# Altium PCB usb_ttl.pcbdoc
Units mil, origin at the board's own origin, x right, y up, seen from the top; angles counter-clockwise.
Board outline 850 x 580 mil, 2 copper layers (Top Layer, Bottom Layer), stack 65.792 mil thick; 10 components, 10 nets, 59 pads, 2 vias.
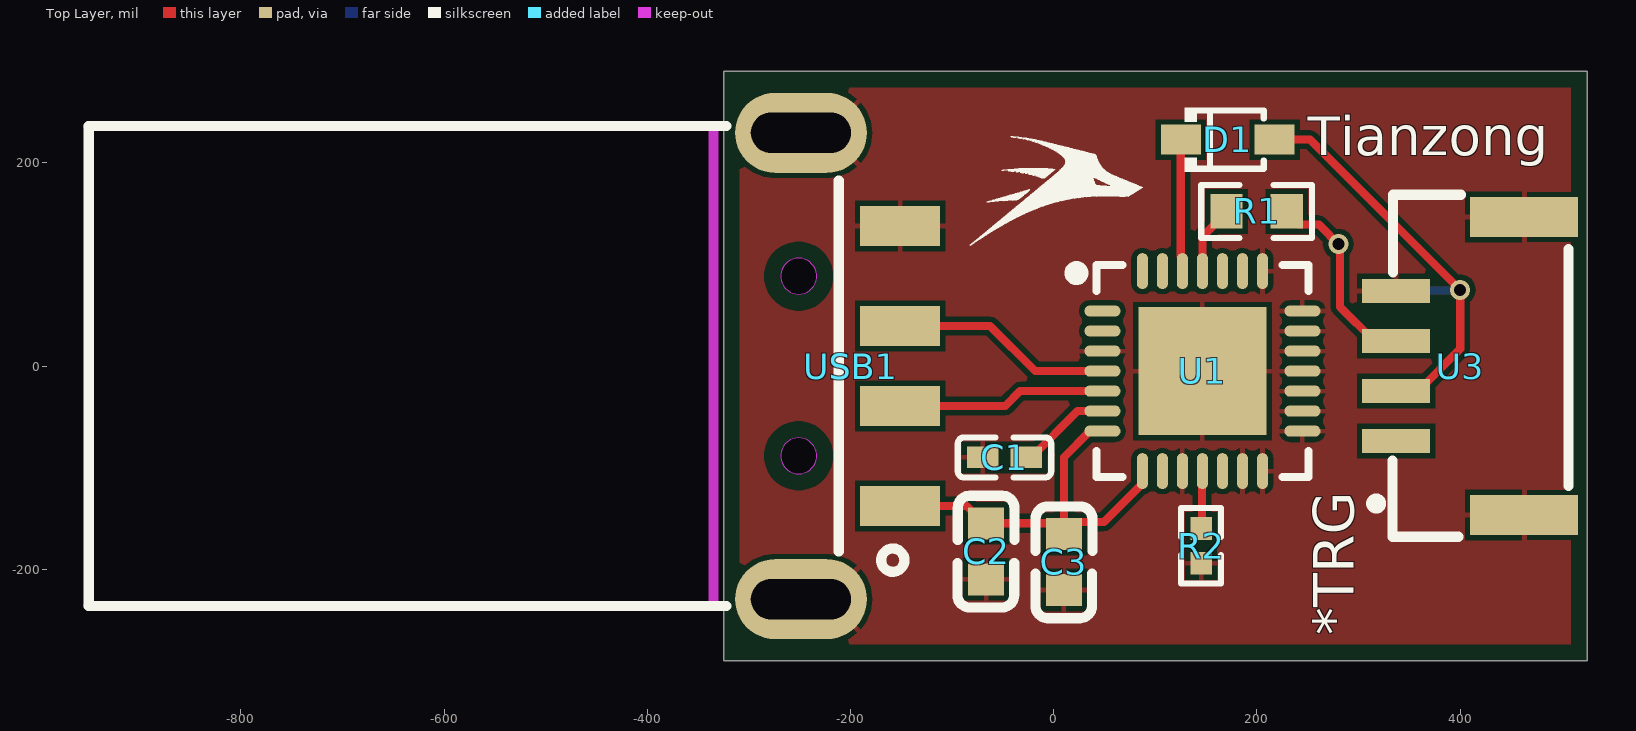
[diagram p0: Top Layer view]
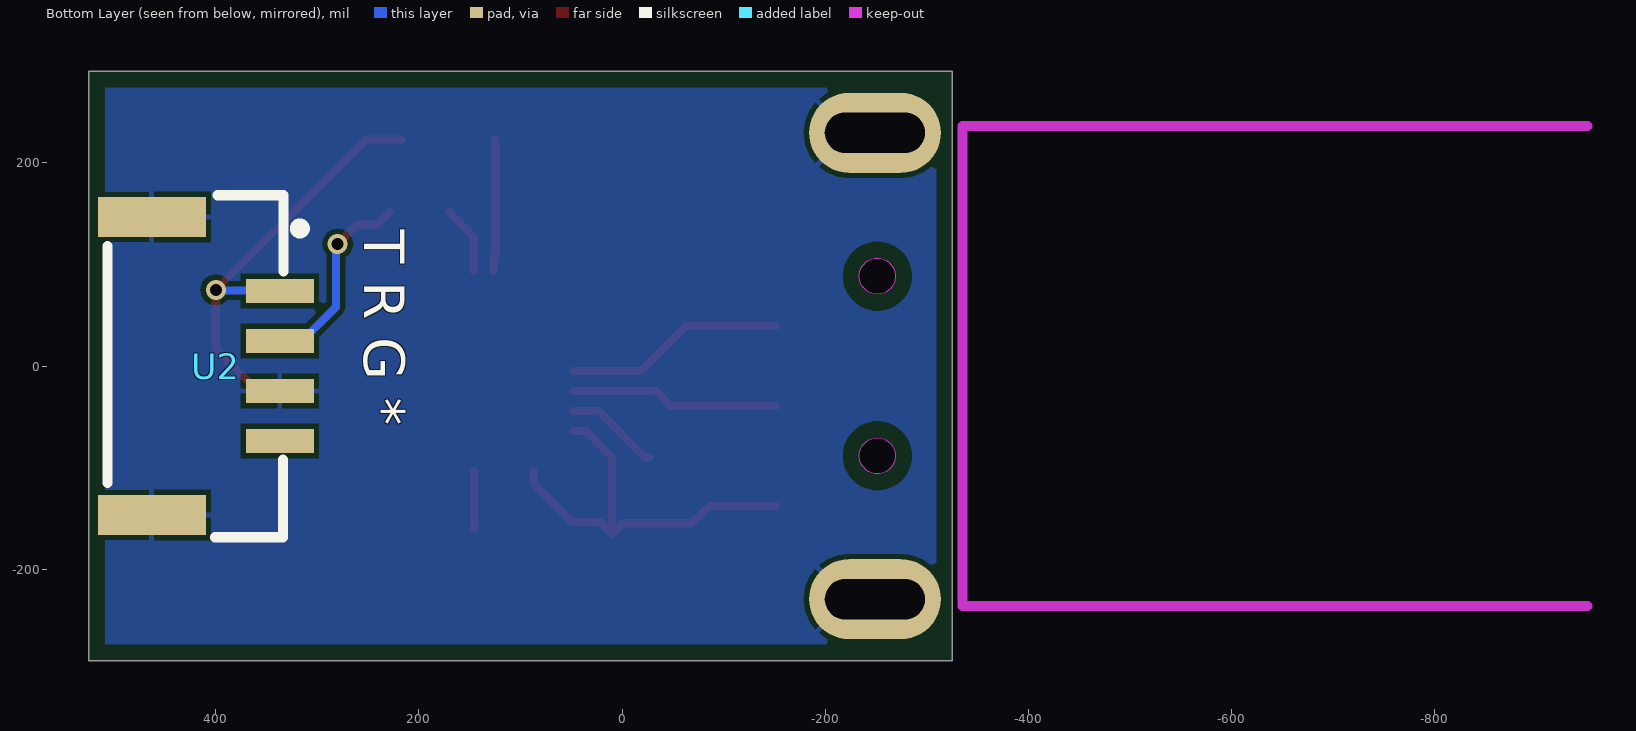
[diagram p1: Bottom Layer view, seen from below]

## Layer stack, top to bottom
Top Solder: solder mask 1, SM-001, Dk 4
Top Layer: signal copper 1.4
Dielectric 1: dielectric 62.9921, FR-4, Dk 4.5
Bottom Layer: signal copper 1.4
Bottom Solder: solder mask 1, SM-001, Dk 4

## Board outline
-325,-290 -325,290 525,290 525,-290

## Design rules (kind name [scope] priority, off if disabled: settings)
BoardOutlineClearance [All] p1: gap=15.75 ignorepadtopadclearanceinfootprint=FALSE
Clearance [All] p1: gap=5 ignorepadtopadclearanceinfootprint=TRUE except(0: Arc-Text Track-Text SMDPad-Text THPad-Text Via-Text Fill-Text Poly-Text Region-Text Text-Text)
HoleSize [All] p1: absolutevalues=TRUE maxlimit=248.03 minlimit=7.87 maxpercent=80.000 minpercent=20.000
MinimumAnnularRing [All] p1: minimumring=7.87
MinimumSolderMaskSliver [All] p1: minsoldermaskwidth=3.94
PlaneClearance [All] p1: clearance=5
PlaneConnect [All] p1: pad.planeconnectstyle=Relief pad.reliefexpansion=5 pad.reliefentries=4 pad.reliefconductorwidth=5 pad.reliefairgap=5 via.planeconnectstyle=Direct via.reliefexpansion=20 via.reliefentries=4 via.reliefconductorwidth=10 via.reliefairgap=10
PolygonConnect [All] p1: thpad.connectstyle=Relief thpad.reliefconductorwidth=5 thpad.reliefentries=4 thpad.polygonreliefangle="45 Angle" thpad.airgapwidth=5 smdpad.connectstyle=Relief smdpad.reliefconductorwidth=5 smdpad.reliefentries=4 smdpad.polygonreliefangle="90 Angle" smdpad.airgapwidth=5 via.connectstyle=Direct via.reliefconductorwidth=10 via.reliefentries=4 via.polygonreliefangle="90 Angle" via.airgapwidth=10
RoutingVias [All] p1: holewidth=11.81 width=19.68 viastyle="Through Hole" minholewidth=11.81 minwidth=19.68 maxholewidth=39.37 maxwidth=78.74
SilkToSilkClearance [All] p1: silktosilkclearance=5.91
SilkToSolderMaskClearance [IsPad] p1: minsilkscreentomaskgap=5.91 clearancetoexposedcopper=TRUE
SolderMaskExpansion [All] p1: expansion=4 istentingtop=FALSE
Width [All] p1: maxlimit=100 minlimit=5 preferedwidth=8 minimp=50.000000 maximp=50.000000 favimp=50.000000
24 further rules are at their usual default settings.

## Components (designator, comment, footprint, x,y, rotation, side; value= is the part's Value field where it differs from the comment)
C1 "100nF" C0402 -48.54,-90 r0 top
C2 "100nF" C0603 -66.66,-182.36 r90 top
C3 "1uF" C0603 10,-192.88 r90 top
D1 "1N4148WS" SOD-323_L1.8-W1.3-LS2.5-RD 171.16,222.76 r0 top
R1 "300Ω" R0603 199.66,152.15 r0 top
R2 "10kΩ" R0402 145,-177.04 r90 top
U1 "CP2102-GMR" WQFN-28_L5.0-W5.0-P0.50-BL-EP3.2 146.3,-5.01 r270 top
U2 "SM04B-GHS-TB(LF)(SN)" CONN-SMD_4P-P1.25_SM04B-GHS-TB-LF-SN 400,0 r270 bottom
U3 "SM04B-GHS-TB(LF)(SN)" CONN-SMD_4P-P1.25_SM04B-GHS-TB-LF-SN 400,0 r90 top
USB1 "917-P81A102ES60200" USB-A-SMD_917-P81A102ES60200 -200,0 r270 top

## Footprints (in the part's own frame and the unit in brackets; to place one, negate y for a bottom-side part, rotate by r counter-clockwise, add the part's x,y. Pads: shape width x height; smd on the part's side, far side on the other; paste and mask are expansions set on the pad)
C0402 [mm]
  rect 0.79x0.54 smd mask+0.051: 1(-0.545,0) 2(0.545,0)
  silkscreen extent -1.17,-0.5 1.17,0.5
C0603 [mm]
  rect 0.8x0.9 smd mask+0.051: 1(-0.7,0) 2(0.7,0)
  silkscreen extent -1.41,-0.71 1.39,0.72
CONN-SMD_4P-P1.25_SM04B-GHS-TB-LF-SN [mm]
  rect 0.6x1.7 smd mask+0.051: 1(-1.876,1.6) 2(-0.626,1.6) 3(0.625,1.6) 4(1.875,1.6)
  rect 1x2.7 smd mask+0.051: 5(3.725,-1.6) 6(-3.725,-1.6)
  silkscreen extent -4.27,-2.71 4.28,2.22
R0402 [mm]
  rect 0.566x0.54 smd mask+0.051: 1(-0.433,0) 2(0.433,0)
  silkscreen extent -0.94,-0.5 0.94,0.5
R0603 [mil]
  rect 31.75x34.02 smd mask+2: 1(-29.66,0) 2(29.66,0)
  silkscreen extent -55,-26 55,26
SOD-323_L1.8-W1.3-LS2.5-RD [mm]
  rect 1x0.75 smd mask+0.051: 1(-1.173,0) 2(1.173,0)
  silkscreen extent -1.08,-0.8 0.9,0.8
USB-A-SMD_917-P81A102ES60200 [mm]
  rect 1x2 smd mask+0.05: 1(3.5,1.24) 2(1,1.24) 3(-1,1.24) 4(-3.5,1.24)
  oval 2x3.3 hole 1 slot 2.5 at 90 deg mask+0.05: 5(-5.83,-1.24) 6(5.83,-1.24)
  Board Outline Layer board cut-out: -1.795,-1.3 -1.84,-1.105 -1.965,-0.948 -2.145,-0.861 -2.345,-0.861 -2.526,-0.948 -2.651,-1.105 -2.695,-1.3 -2.695,-1.3 -2.651,-1.495 -2.526,-1.652 -2.345,-1.739 -2.145,-1.739 -1.965,-1.652 -1.84,-1.495 -1.795,-1.3 -1.795,-1.3
  Board Outline Layer board cut-out: 2.695,-1.3 2.651,-1.105 2.526,-0.948 2.345,-0.861 2.145,-0.861 1.965,-0.948 1.84,-1.105 1.795,-1.3 1.795,-1.3 1.84,-1.495 1.965,-1.652 2.145,-1.739 2.345,-1.739 2.526,-1.652 2.651,-1.495 2.695,-1.3 2.695,-1.3
  Board Outline Layer lines w0.254: 6,-3.428 6,-19.045 6,-3.428 ; 6,-3.428 -6,-3.428 ; 6,-3.428 -6,-3.428 ; -6,-3.428 -6,-19.045 -6,-3.428
  silkscreen extent -6,-19.04 6,1.35
WQFN-28_L5.0-W5.0-P0.50-BL-EP3.2 [mm]
  oval 0.28x0.9 smd mask+0.051: 1(-1.501,-2.5) 2(-1.001,-2.5) 3(-0.501,-2.5) 4(0,-2.5) 5(0.5,-2.5) 6(1.001,-2.5) 7(1.501,-2.5) 15(1.501,2.5) 16(1.001,2.5) 17(0.5,2.5) 18(0,2.5) 19(-0.501,2.5) 20(-1.001,2.5) 21(-1.501,2.5)
  oval 0.9x0.28 smd mask+0.051: 8(2.5,-1.501) 9(2.5,-1.001) 10(2.5,-0.501) 11(2.5,0) 12(2.5,0.5) 13(2.5,1.001) 14(2.5,1.501) 22(-2.5,1.501) 23(-2.5,1.001) 24(-2.5,0.5) 25(-2.5,0) 26(-2.5,-0.501) 27(-2.5,-1.001) 28(-2.5,-1.501)
  rect 3.2x3.2 smd mask+0.051: 29(0,0)
  silkscreen extent -2.65,-3.3 2.65,2.65

## Part data
C1: library part CL05B104KB54PNC, "容值:100nF;精度:±10%;额定电压:50V;材质(温度系数):X7R;", JLCPCB Part Class="Basic Part", LCSC Part Name="100nF ±10% 50V", Manufacturer=SAMSUNG(三星), Temperature Coefficient=X7R, Tolerance=±10%, Voltage Rated=50V, Add into BOM=yes, Convert to PCB=yes, Datasheet=https://atta.szlcsc.com/upload/public/pdf/source/20181009/C307331_222F7C870FD3EA5F46F538B483443886.pdf, Device=CL05B104KB54PNC, Manufacturer Part=CL05B104KB54PNC, Name=100nF, Supplier=LCSC, Supplier Footprint=0402, Supplier Part=C307331, Symbol=CL05B104KB54PNC
C2: library part CC0603KRX7R9BB104, "容值:100nF;精度:±10%;额定电压:50V;材质(温度系数):X7R;", JLCPCB Part Class="Basic Part", LCSC Part Name="100nF ±10% 50V", Manufacturer=YAGEO(国巨), Temperature Coefficient=X7R, Tolerance=±10%, Voltage Rated=50V, Add into BOM=yes, Convert to PCB=yes, Datasheet=https://atta.szlcsc.com/upload/public/pdf/source/20170116/1484561234239.pdf, Device=CC0603KRX7R9BB104, Manufacturer Part=CC0603KRX7R9BB104, Name=100nF, Supplier=LCSC, Supplier Footprint=0603, Supplier Part=C14663, Symbol=CC0603KRX7R9BB104
C3: library part CL10A105KB8NNNC, "容值:1uF;精度:±10%;额定电压:50V;材质(温度系数):X5R;", JLCPCB Part Class="Basic Part", LCSC Part Name="1uF ±10% 50V", Manufacturer=SAMSUNG(三星), Temperature Coefficient=X5R, Tolerance=±10%, Voltage Rated=50V, Add into BOM=yes, Convert to PCB=yes, Datasheet=https://atta.szlcsc.com/upload/public/pdf/source/20160103/1457707679084.pdf, Device=CL10A105KB8NNNC, Manufacturer Part=CL10A105KB8NNNC, Name=1uF, Supplier=LCSC, Supplier Footprint=0603, Supplier Part=C15849, Symbol=CL10A105KB8NNNC
D1: library part 1N4148WS_C2128, "二极管配置:独立式;功率:200mW;直流反向耐压(Vr):100V;平均整流电流(Io):150mA;正向压降(Vf):1.25V@150mA;反向电流(Ir):1uA@75V;反向恢复时间(trr):4ns;工作温度:+150℃@(Tj);", Average Rectified Current (Io)=150mA, Forward Voltage (Vf@If)=1.25V@150mA, JLCPCB Part Class="Basic Part", LCSC Part Name="100V 150mA 4ns T4", Manufacturer=CJ(江苏长电/长晶), Operating Temperature=+150℃@(Tj), Power Dissipation=200mW, Reverse Leakage Current=1uA@75V, Reverse Voltage (Vr)=100V, Add into BOM=yes, Convert to PCB=yes, Datasheet=https://atta.szlcsc.com/upload/public/pdf/source/20140809/1457707208178.pdf, Device=1N4148WS_C2128, Diode Configuration=独立式, Manufacturer Part=1N4148WS, Name=1N4148WS, Reverse Recovery Time (trr)=4ns, Supplier=LCSC, Supplier Footprint=SOD-323, Supplier Part=C2128, Symbol="1N4148WS T4"
R1: library part 0603WAF3000T5E, "电阻类型:厚膜电阻;阻值:300Ω;精度:±1%;功率:100mW;温度系数:±100ppm/℃;最大工作电压:75V;工作温度范围:-55℃~+155℃;", JLCPCB Part Class="Basic Part", LCSC Part Name="300Ω ±1% 100mW", Manufacturer=UNI-ROYAL(厚声), Operating Temperature Range=-55℃~+155℃, Overload Voltage (Max)=75V, Power(Watts)=100mW, Temperature Coefficient=±100ppm/℃, Tolerance=±1%, Add into BOM=yes, Convert to PCB=yes, Datasheet=https://atta.szlcsc.com/upload/public/pdf/source/20200306/C422600_1E6D84923E4A46A82E41ADD87F860B5C.pdf, Device=0603WAF3000T5E, Manufacturer Part=0603WAF3000T5E, Name=300Ω, Supplier=LCSC, Supplier Footprint=0603, Supplier Part=C23025, Symbol=0603WAF3000T5E, Type=厚膜电阻
R2: library part 0402WGF1002TCE, "电阻类型:厚膜电阻;阻值:10kΩ;精度:±1%;功率:62.5mW;温度系数:±100ppm/℃;最大工作电压:50V;工作温度范围:-55℃~+155℃;", JLCPCB Part Class="Basic Part", LCSC Part Name="10kΩ ±1% 62.5mW", Manufacturer=UNI-ROYAL(厚声), Operating Temperature Range=-55℃~+155℃, Overload Voltage (Max)=50V, Power(Watts)=62.5mW, Temperature Coefficient=±100ppm/℃, Tolerance=±1%, Add into BOM=yes, Convert to PCB=yes, Datasheet=https://atta.szlcsc.com/upload/public/pdf/source/20200306/C422600_1E6D84923E4A46A82E41ADD87F860B5C.pdf, Device=0402WGF1002TCE, Manufacturer Part=0402WGF1002TCE, Name=10kΩ, Supplier=LCSC, Supplier Footprint=0402, Supplier Part=C25744, Symbol=0402WGF1002TCE, Type=厚膜电阻
U1: "类型:Transceiver;协议类别:USB;驱动器/接收器数:1/1;数据速率:1Mbps;", JLCPCB Part Class="Basic Part", Manufacturer="SILICON LABS(芯科)", Supply Voltage="3V ~ 3.6V", Add into BOM=yes, Convert to PCB=yes, Data Rate=1Mbps, Datasheet=https://atta.szlcsc.com/upload/public/pdf/source/20170103/1483439882795.pdf, Device=CP2102-GMR, LCSC Part Name=CP2102-GMR, Manufacturer Part=CP2102-GMR, Name=CP2102-GMR, Number of Drivers/Receivers=1/1, Protocol=USB, Supplier=LCSC, Supplier Footprint=QFN-28(5x5), Supplier Part=C6568, Symbol=CP2102-GMR, Type=Transceiver
U2 U3: "参考系列:GH;间距:1.25mm;插针结构:1x4P;排数:1;每排PIN数:4;行距:-;安装方式:-;触头材质:磷青铜;", JLCPCB Part Class="Extended Part", LCSC Part Name="GH 1.25mm 1x4P", Manufacturer=JST, Add into BOM=yes, Contact Material=磷青铜, Convert to PCB=yes, Datasheet=https://atta.szlcsc.com/upload/public/pdf/source/20180327/C189895_E152F1273677DB005E39DD42455B7B10.pdf, Device=SM04B-GHS-TB(LF)(SN), Manufacturer Part=SM04B-GHS-TB(LF)(SN), Mounting Style=-, Name=SM04B-GHS-TB(LF)(SN), Number of PINs Per Row=4, Number of Rows=1, Pins Structure=1x4P, Pitch=1.25mm, Reference Series=GH, Row Spacing=-, Supplier=LCSC, Supplier Footprint=SMD,P=1.25mm, Supplier Part=C189895, Symbol=SM04B-GHS-TB(LF)(SN)
  U2: NUMBER=6
  U3: NUMBER=5
USB1: "连接器类型:Type-A;标准:USB 2.0;公母:公头;触点数量:4;端口数量:1;安装方式:沉板;额定电流 - 电源:1.5A;工作温度范围:-;", Current Rating - Power (Max)=1.5A, JLCPCB Part Class="Extended Part", LCSC Part Name="Type-A 公头 沉板 有孔铁壳带柱黑胶/24H", Manufacturer=精拓金, Operating Temperature Range=-, Add into BOM=yes, Connector Type=Type-A, Convert to PCB=yes, Datasheet=https://atta.szlcsc.com/upload/public/pdf/source/20210526/C2763087_AA2AFCC8C4584FF12A3F9960AE4ACDBB.pdf, Device=917-P81A102ES60200, Gender=公头, Manufacturer Part=917-P81A102ES60200, Mounting Style=沉板, Name=917-P81A102ES60200, Number of Contacts=4, Number of Ports=1, Standard="USB 2.0", Supplier=LCSC, Supplier Footprint=SMD, Supplier Part=C2763087, Symbol=917-P81A102ES60200

## Via types
v1: diameter 19.68, hole 11.81, Top Layer to Bottom Layer, 2 vias

## Nets (pads, with @x,y where several pads share a name; then routed paths per layer and width w, separated by ;. In a path a pad name is that pad's centre, name@x,y a point inside that pad or via, vN(x,y) a via of type N, cw(c..) or ccw(c..) an arc to the next point about the centre after c; other vN are vias at no path point)
GND: C1.1 C2.1 C3.1 R2.1 U1.3 U1.10 U1.13 U1.14 U1.15 U1.16 U1.17 U1.18 U1.19 U1.20 U1.21 U1.22 U1.29 U2.3 U2.5 U2.6 U3.4 U3.5 U3.6 USB1.4 USB1.5 USB1.6
NetC1_2: C1.2 U1.6 | length 93.8
  Top Layer w8: C1.2 -22.16,-90 23.44,-44.4 U1.6
NetC2_2: C2.2 C3.2 U1.7 U1.8 USB1.1 | length 406.6
  Top Layer w8: USB1.1 -85.64,-137.8 -68.63,-154.8 C2.2 -0.52,-154.8 C3.2 ; U1.7 35.67,-64.1 10,-89.77 C3.2 ; U1.8 87.2,-115.63 49.26,-153.57 21.75,-153.57 C3.2
NetD1_1: D1.1 U1.26 | length 130
  Top Layer w8: D1.1 125,108.04 126.6,106.44 U1.26
NetR1_1: R1.1 U1.25 | length 68.6
  Top Layer w8: U1.25 146.3,127.32 170,151.02 R1.1
NetR2_2: R2.2 U1.11 | length 57.1
  Top Layer w8: R2.2 145.72,-159.28 145.72,-104.01 U1.11
NetU1_4: U1.4 USB1.3 | length 217.4
  Top Layer w8: USB1.3 -62.66,39.37 -18.29,-5 U1.4
NetU1_5: U1.5 USB1.2 | length 205.1
  Top Layer w8: USB1.2 -47.81,-39.37 -33.14,-24.7 U1.5
RX: R1.2 U2.2 U3.3 | length 328.1
  Top Layer w8: R1.2 229.32,151.02 241.2,139.15 260.85,139.15 281.8,118.2 281.8,58.16 315.37,24.59 U3.3
  Bottom Layer w8: v1(280,120) 281.84,118.16 281.84,58.16 315.37,24.63 U2.2
TX: D1.2 U2.1 U3.2 | length 445.7
  Top Layer w8: D1.2 252.24,222.76 v1(400,75) 400,16.69 358.68,-24.63 U3.2
  Bottom Layer w8: U2.1 337.61,74.42 399.42,74.42 v1(400,75)
pads on no net: U1.1 U1.2 U1.9 U1.12 U1.23 U1.24 U1.27 U1.28 U2.4 U3.1

## Polygon pours and split planes (outlines as drawn)
GND on Top Layer "GND_L01_P000" (solid, pour order 0): -325,-290 -325,290 525,290 525,-290
GND on Bottom Layer "GND_L02_P001" (solid, pour order 1): -325,-290 -325,290 525,290 525,-290

## Silkscreen, mask and mechanical layers (free items; w line width, h text height)
Top Overlay:
  drawing of 3 lines, arcs and shapes, not listed
  text "Tianzong" at 250,207.66 h38
  text "*TRG" at 295,-265 h40 r90
Bottom Overlay:
  text "T R G *" at 254,134 h40 r90
Mechanical Layer:
  the board outline again, w10